# EAGLE board csa_vdc_v1 (EAGLE 6.4), part 1 of 2
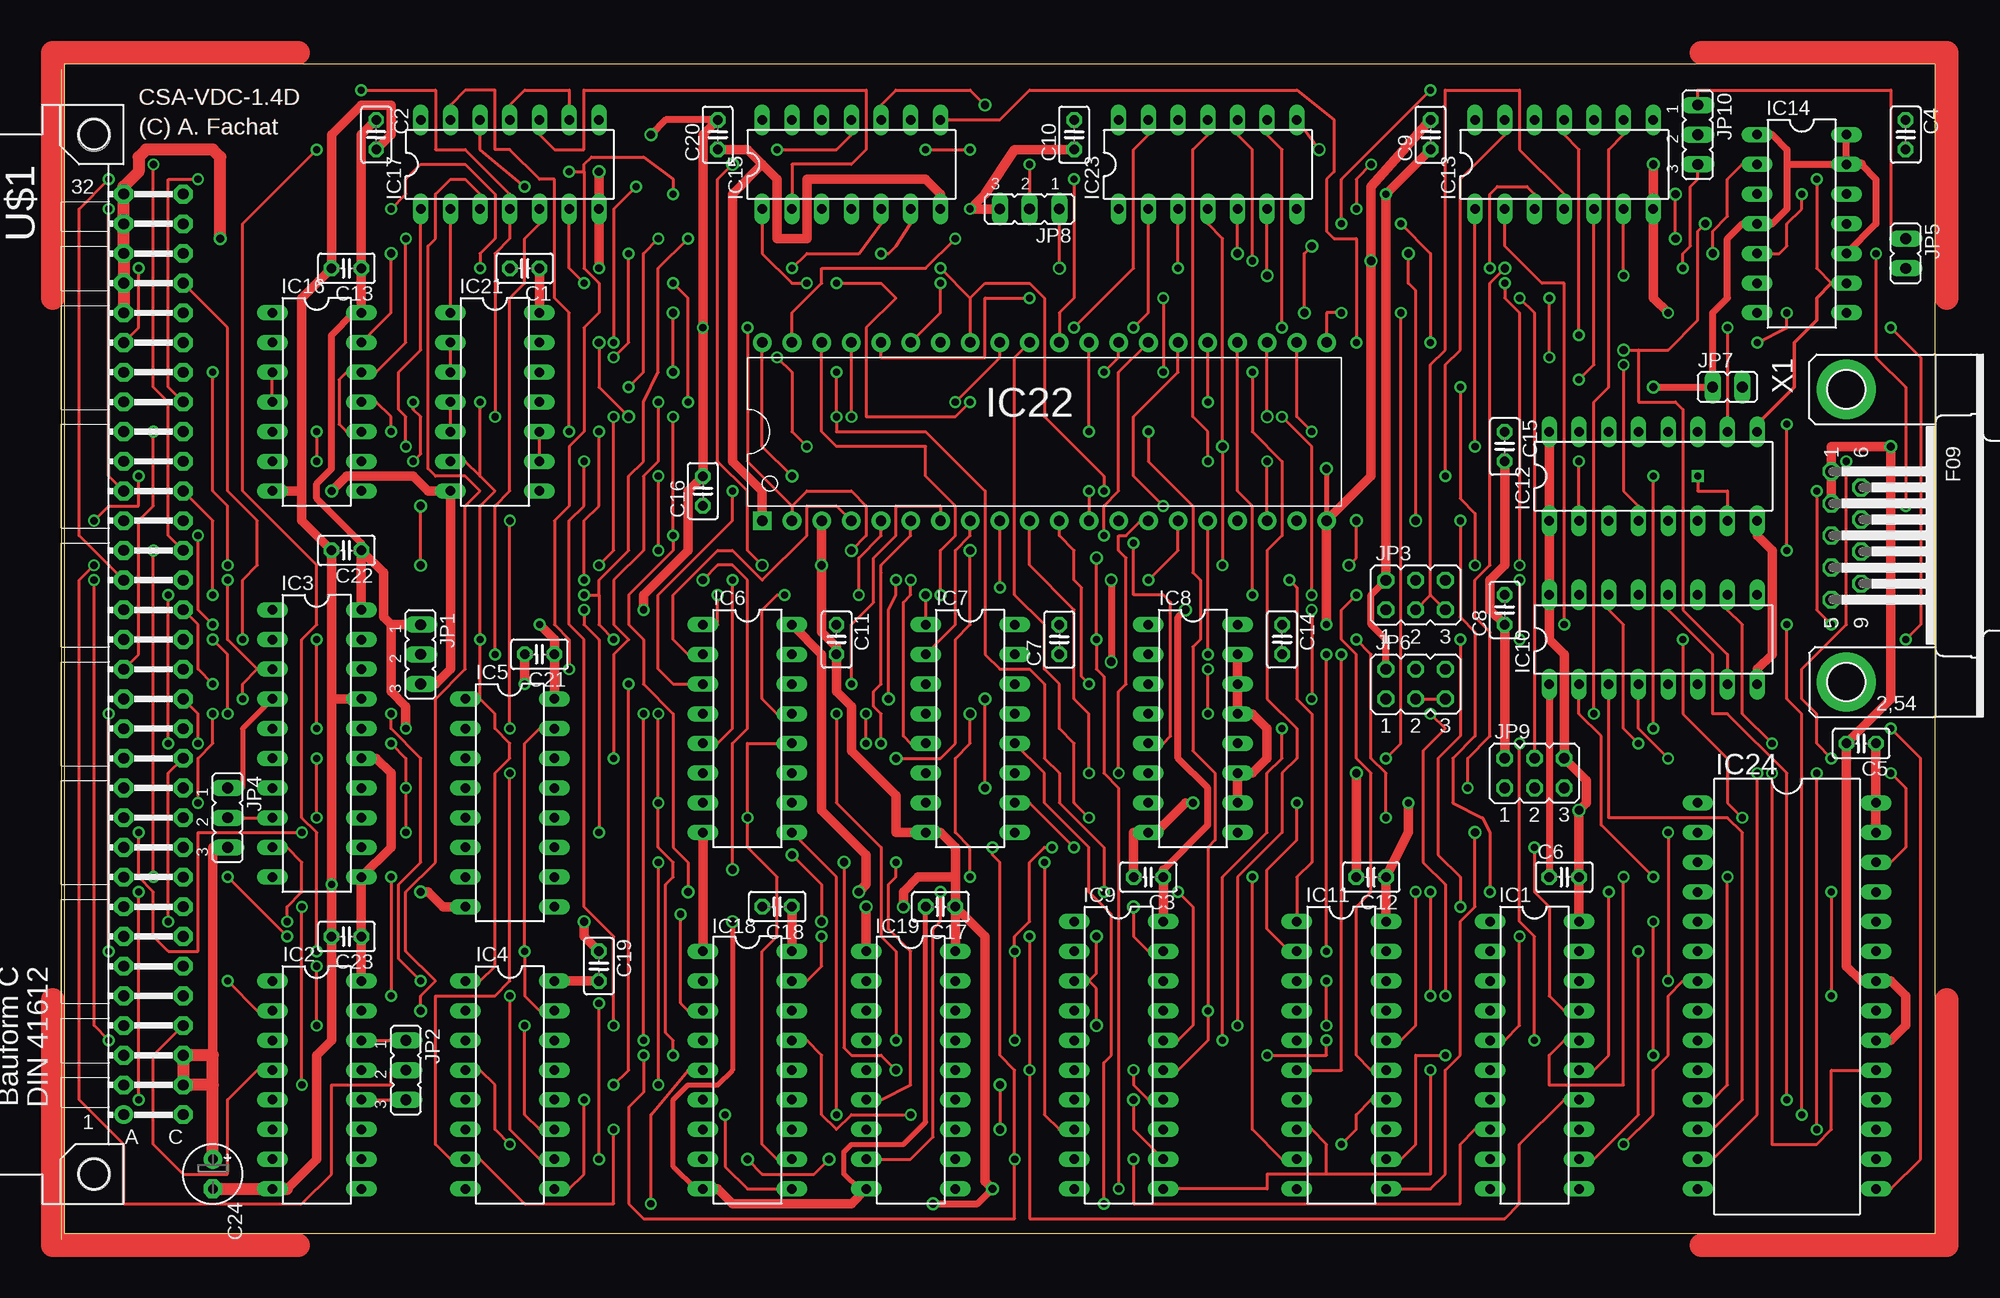
[diagram p0: board, top side]
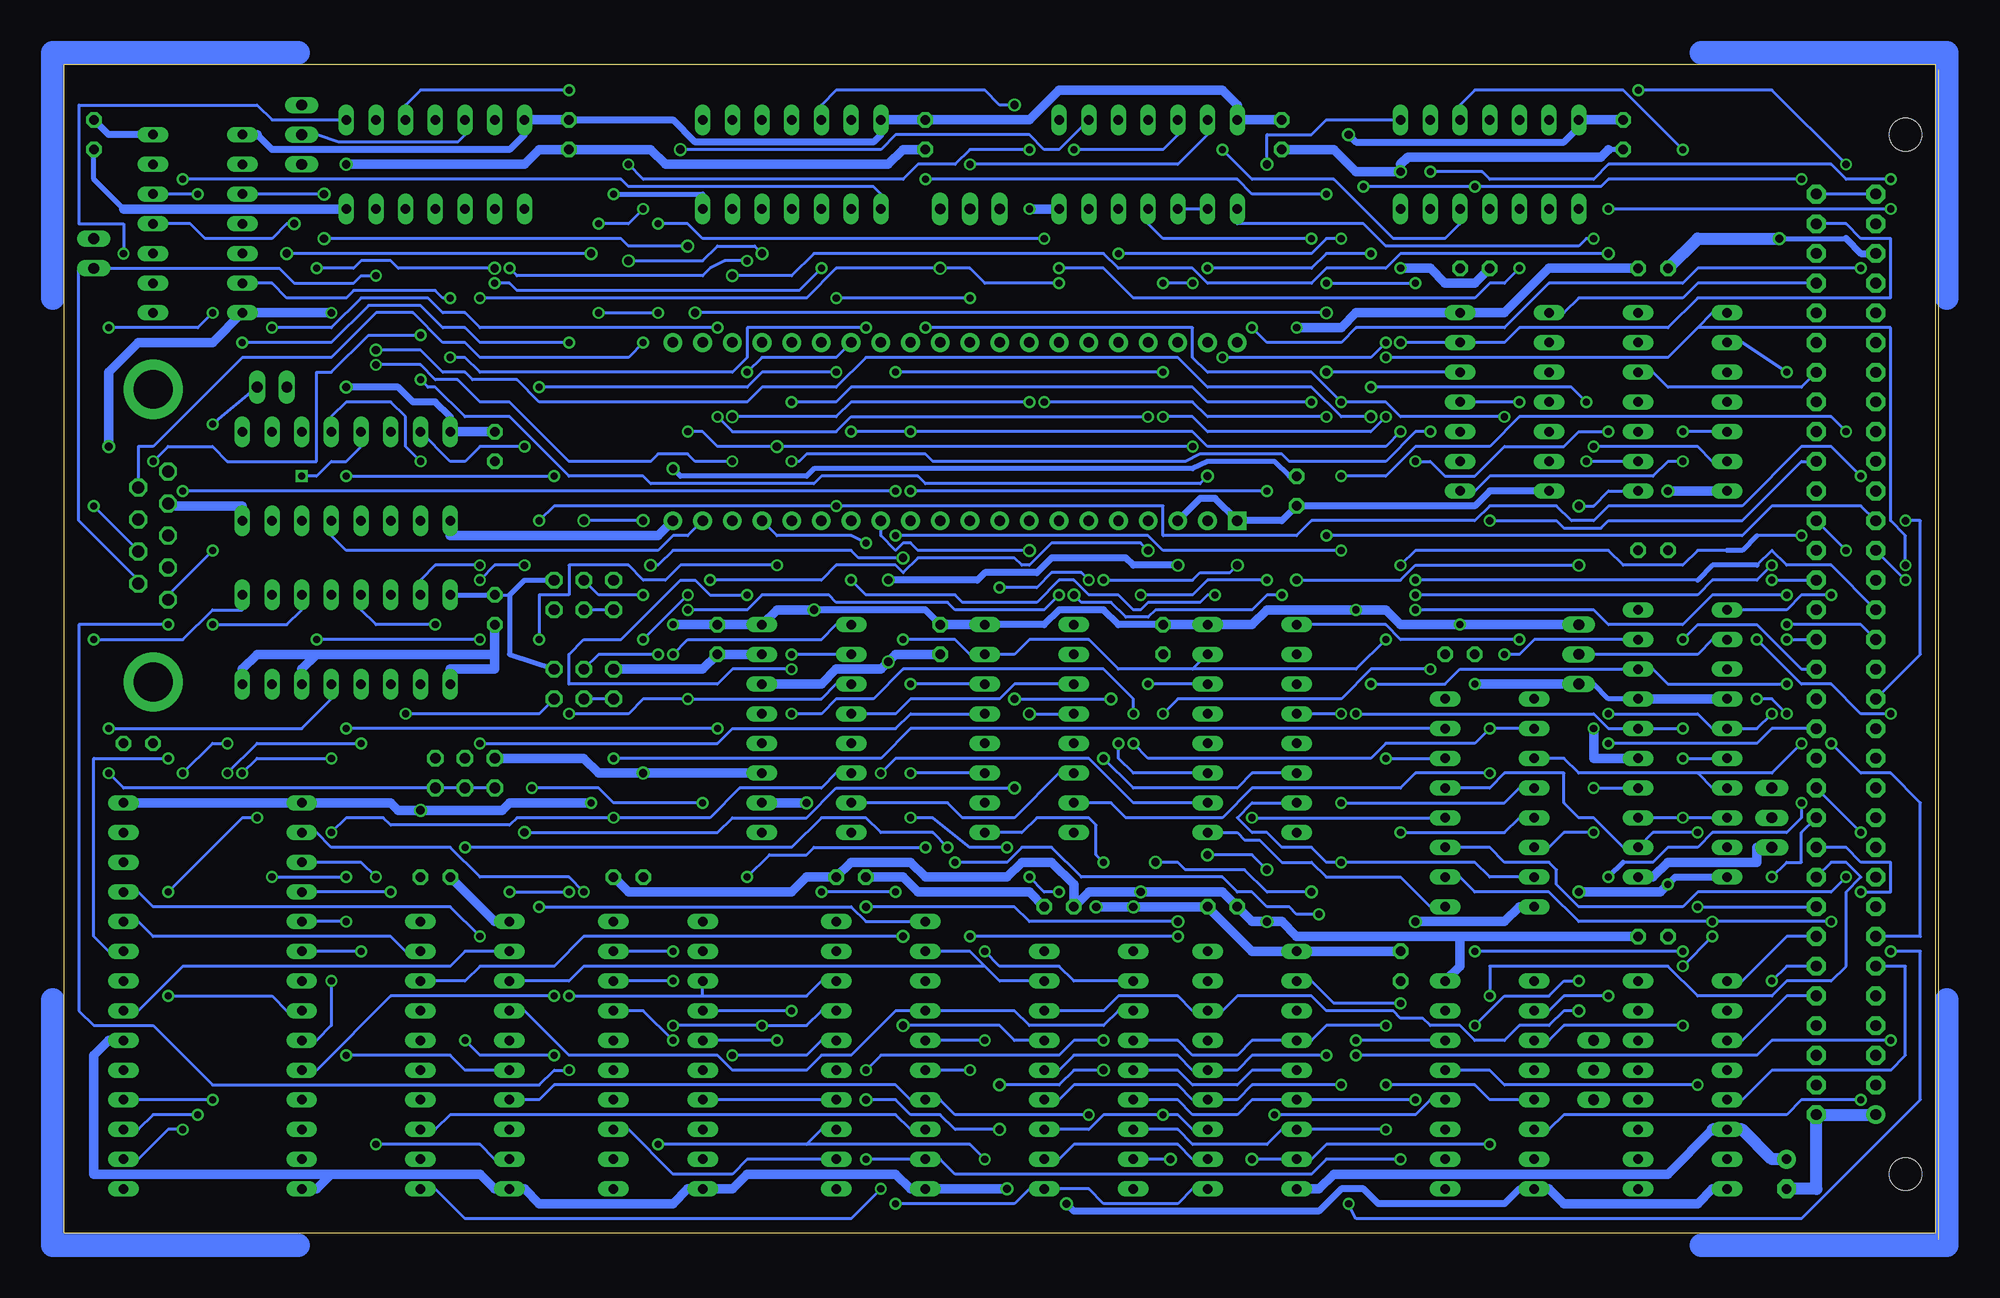
[diagram p1: board, bottom side, seen from below]

Size 160 x 100 mm. Coordinates in mm from the lower left corner, seen from the top.
Outline: 0,0 160,0 160,100 0,100 0,0
Copper layers (1*16): Top 0.035mm / dielectric 1.5mm / Bottom 0.035mm
Design rules "default": minimum track width 10mil, minimum drill 24mil, track to track 8mil, track to pad 8mil, pad to pad 8mil, via to via 8mil, smd to smd 8mil, copper to edge 40mil, drill to drill 8mil, minimum pad ring 10mil, minimum via ring 8mil, stop-mask expansion 4mil, vias tented up to drill 0mil, thermal gap 10mil

## Footprints (pad centres in the part's own frame; a part is rotated, then mirrored left to right if it is on the bottom)
C025-025X050 = drill 0.813 octagon: 1 -1.27,0; 2 1.27,0
E2,5-5 = drill 0.813 pad 1.6: + -1.27,0 | drill 0.813 pad 1.6 octagon: - 1.27,0
DIL20 = drill 0.813 long: 1 -11.43,-3.81; 2 -8.89,-3.81; 3 -6.35,-3.81; 4 -3.81,-3.81; 5 -1.27,-3.81; 6 1.27,-3.81; 7 3.81,-3.81; 8 6.35,-3.81; 9 8.89,-3.81; 10 11.43,-3.81; 11 11.43,3.81; 12 8.89,3.81; 13 6.35,3.81; 14 3.81,3.81; 15 1.27,3.81; 16 -1.27,3.81; 17 -3.81,3.81; 18 -6.35,3.81; 19 -8.89,3.81; 20 -11.43,3.81
DIL16 = drill 0.813 long: 1 -8.89,-3.81; 2 -6.35,-3.81; 3 -3.81,-3.81; 4 -1.27,-3.81; 5 1.27,-3.81; 6 3.81,-3.81; 7 6.35,-3.81; 8 8.89,-3.81; 9 8.89,3.81; 10 6.35,3.81; 11 3.81,3.81; 12 1.27,3.81; 13 -1.27,3.81; 14 -3.81,3.81; 15 -6.35,3.81; 16 -8.89,3.81
DIL20' = drill 0.813 long: 1 -10.16,-3.81; 2 -7.62,-3.81; 3 -5.08,-3.81; 4 -2.54,-3.81; 5 0,-3.81; 6 2.54,-3.81; 7 5.08,-3.81; 8 7.62,-3.81; 9 10.16,-3.81; 10 12.7,-3.81; 11 12.7,3.81; 12 10.16,3.81; 13 7.62,3.81; 14 5.08,3.81; 15 2.54,3.81; 16 0,3.81; 17 -2.54,3.81; 18 -5.08,3.81; 19 -7.62,3.81; 20 -10.16,3.81
DIL14 = drill 0.813 long: 1 -7.62,-3.81; 2 -5.08,-3.81; 3 -2.54,-3.81; 4 0,-3.81; 5 2.54,-3.81; 6 5.08,-3.81; 7 7.62,-3.81; 8 7.62,3.81; 9 5.08,3.81; 10 2.54,3.81; 11 0,3.81; 12 -2.54,3.81; 13 -5.08,3.81; 14 -7.62,3.81
DIL18 = drill 0.813 long: 1 -10.16,-3.81; 2 -7.62,-3.81; 3 -5.08,-3.81; 4 -2.54,-3.81; 5 0,-3.81; 6 2.54,-3.81; 7 5.08,-3.81; 8 7.62,-3.81; 9 10.16,-3.81; 10 10.16,3.81; 11 7.62,3.81; 12 5.08,3.81; 13 2.54,3.81; 14 0,3.81; 15 -2.54,3.81; 16 -5.08,3.81; 17 -7.62,3.81; 18 -10.16,3.81
DIP40 = drill 0.889 pad 1.6 square: 1 -24.13,-7.62 | drill 0.889 pad 1.6: 2 -21.59,-7.62; 3 -19.05,-7.62; 4 -16.51,-7.62; 5 -13.97,-7.62; 6 -11.43,-7.62; 7 -8.89,-7.62; 8 -6.35,-7.62; 9 -3.81,-7.62; 10 -1.27,-7.62; 11 1.27,-7.62; 12 3.81,-7.62; 13 6.35,-7.62; 14 8.89,-7.62; 15 11.43,-7.62; 16 13.97,-7.62; 17 16.51,-7.62; 18 19.05,-7.62; 19 21.59,-7.62; 20 24.13,-7.62; 21 24.13,7.62; 22 21.59,7.62; 23 19.05,7.62; 24 16.51,7.62; 25 13.97,7.62; 26 11.43,7.62; 27 8.89,7.62; 28 6.35,7.62; 29 3.81,7.62; 30 1.27,7.62; 31 -1.27,7.62; 32 -3.81,7.62; 33 -6.35,7.62; 34 -8.89,7.62; 35 -11.43,7.62; 36 -13.97,7.62; 37 -16.51,7.62; 38 -19.05,7.62; 39 -21.59,7.62; 40 -24.13,7.62
DIL28-6 = drill 0.813 long: 1 -16.51,-7.62; 2 -13.97,-7.62; 3 -11.43,-7.62; 4 -8.89,-7.62; 5 -6.35,-7.62; 6 -3.81,-7.62; 7 -1.27,-7.62; 8 1.27,-7.62; 9 3.81,-7.62; 10 6.35,-7.62; 11 8.89,-7.62; 12 11.43,-7.62; 13 13.97,-7.62; 14 16.51,-7.62; 15 16.51,7.62; 16 13.97,7.62; 17 11.43,7.62; 18 8.89,7.62; 19 6.35,7.62; 20 3.81,7.62; 21 1.27,7.62; 22 -1.27,7.62; 23 -3.81,7.62; 24 -6.35,7.62; 25 -8.89,7.62; 26 -11.43,7.62; 27 -13.97,7.62; 28 -16.51,7.62
JP2 = drill 0.914 long: 1 -2.54,0; 2 0,0; 3 2.54,0
JP3Q = drill 0.914 octagon: 1 -2.54,-1.27; 2 -2.54,1.27; 3 0,-1.27; 4 0,1.27; 5 2.54,-1.27; 6 2.54,1.27
JP1 = drill 0.914 long: 1 0,-1.27; 2 0,1.27
CSABUS = drill 0.914 pad 1.6: A1 7.62,36.83 | drill 0.914 pad 1.6 octagon: A2 7.62,34.29; A3 7.62,31.75; A4 7.62,29.21; A5 7.62,26.67; A6 7.62,24.13; A7 7.62,21.59; A8 7.62,19.05; A9 7.62,16.51; A10 7.62,13.97; A11 7.62,11.43; A12 7.62,8.89; A13 7.62,6.35; A14 7.62,3.81; A15 7.62,1.27; A16 7.62,-1.27; A17 7.62,-3.81; A18 7.62,-6.35; A19 7.62,-8.89; A20 7.62,-11.43; A21 7.62,-13.97; A22 7.62,-16.51; A23 7.62,-19.05; A24 7.62,-21.59; A25 7.62,-24.13; A26 7.62,-26.67; A27 7.62,-29.21; A28 7.62,-31.75; A29 7.62,-34.29; A30 7.62,-36.83; A31 7.62,-39.37; A32 7.62,-41.91; C1 2.54,36.83; C2 2.54,34.29; C3 2.54,31.75; C4 2.54,29.21; C5 2.54,26.67; C6 2.54,24.13; C7 2.54,21.59; C8 2.54,19.05; C9 2.54,16.51; C10 2.54,13.97; C11 2.54,11.43; C12 2.54,8.89; C13 2.54,6.35; C14 2.54,3.81; C15 2.54,1.27; C16 2.54,-1.27; C17 2.54,-3.81; C18 2.54,-6.35; C19 2.54,-8.89; C20 2.54,-11.43; C21 2.54,-13.97; C22 2.54,-16.51; C23 2.54,-19.05; C24 2.54,-21.59; C25 2.54,-24.13; C26 2.54,-26.67; C27 2.54,-29.21; C28 2.54,-31.75; C29 2.54,-34.29; C30 2.54,-36.83; C31 2.54,-39.37; C32 2.54,-41.91 | hole 2.794: 10.16,41.91; 10.16,-46.99
F09HP = drill 1.016 octagon: 1 -5.486,-1.27; 2 -2.743,-1.27; 3 0,-1.27; 4 2.743,-1.27; 5 5.486,-1.27; 6 -4.115,1.27; 7 -1.372,1.27; 8 1.372,1.27; 9 4.115,1.27 | drill 3.302 pad 5.08: G1 -12.522,0; G2 12.522,0

## Placement (x,y rotation side)
C1  100n  [C025-025X050]  39.37,82.55 180 top
C2  100n  [C025-025X050]  26.67,93.98 270 top
C3  100n  [C025-025X050]  92.71,30.48 180 top
C4  100n  [C025-025X050]  157.48,93.98 270 top
C5  100n  [C025-025X050]  153.67,41.91 180 top
C6  100n  [C025-025X050]  128.27,30.48 0 top
C7  100n  [C025-025X050]  85.09,50.8 90 top
C8  100n  [C025-025X050]  123.19,53.34 90 top
C9  100n  [C025-025X050]  116.84,93.98 90 top
C10  100n  [C025-025X050]  86.36,93.98 90 top
C11  100n  [C025-025X050]  66.04,50.8 270 top
C12  100n  [C025-025X050]  111.76,30.48 180 top
C13  100n  [C025-025X050]  24.13,82.55 180 top
C14  100n  [C025-025X050]  104.14,50.8 270 top
C15  100n  [C025-025X050]  123.19,67.31 270 top
C16  100n  [C025-025X050]  54.61,63.5 90 top
C17  100n  [C025-025X050]  74.93,27.94 180 top
C18  100n  [C025-025X050]  60.96,27.94 180 top
C19  100n  [C025-025X050]  45.72,22.86 270 top
C20  100n  [C025-025X050]  55.88,93.98 90 top
C21  100n  [C025-025X050]  40.64,49.53 180 top
C22  100n  [C025-025X050]  24.13,58.42 180 top
C23  100n  [C025-025X050]  24.13,25.4 180 top
C24  47u  [E2,5-5]  12.7,5.08 270 top
IC1  74HC374N  [DIL20]  125.73,15.24 270 top
IC2  74HCT138N  [DIL16]  21.59,12.7 270 top
IC3  74LS688BUSOPT  [DIL20']  21.59,43.18 270 top
IC4  74HCT257N  [DIL16]  38.1,12.7 270 top
IC5  74HCT257N  [DIL16]  38.1,36.83 270 top
IC6  74HCT257N  [DIL16]  58.42,43.18 270 top
IC7  74HCT257N  [DIL16]  77.47,43.18 270 top
IC8  74HCT257N  [DIL16]  96.52,43.18 270 top
IC9  74HCT245N  [DIL20]  90.17,15.24 270 top
IC10  74HCT166N  [DIL16]  135.89,50.8 0 top
IC11  74LS273BUSOPT  [DIL20']  109.22,16.51 270 top
IC12  74HCT175N  [DIL16]  135.89,64.77 0 top
IC13  74LS86N  [DIL14]  128.27,91.44 0 top
IC14  74HCT74N  [DIL14]  148.59,86.36 270 top
IC15  74HCT04N  [DIL14]  67.31,91.44 0 top
IC16  74HCT00N  [DIL14]  21.59,71.12 270 top
IC17  74LS32N  [DIL14]  38.1,91.44 0 top
IC18  [DIL18]  58.42,13.97 270 top
IC19  [DIL18]  72.39,13.97 270 top
IC21  74HCT04N  [DIL14]  36.83,71.12 270 top
IC22  CRTC6545SMALLPADS  [DIP40]  83.82,68.58 0 top
IC23  74HCT00N  [DIL14]  97.79,91.44 0 top
IC24  27C128P  [DIL28-6]  147.32,20.32 270 top
JP1  [JP2]  30.48,49.53 270 top
JP2  [JP2]  29.21,13.97 270 top
JP3  [JP3Q]  115.57,54.61 0 top
JP4  [JP2]  13.97,35.56 270 top
JP5  [JP1]  157.48,83.82 180 top
JP6  [JP3Q]  115.57,46.99 0 top
JP7  [JP1]  142.24,72.39 270 top
JP8  [JP2]  82.55,87.63 180 top
JP9  [JP3Q]  125.73,39.37 0 top
JP10  [JP2]  139.7,93.98 270 top
U$1  CSABUS  [CSABUS]  12.7,46.99 180 top
X1  [F09HP]  152.4,59.69 270 top

## Library data of the parts
C1-C24 = rcl
IC1 IC2 IC4-IC10 IC12 IC14-IC16 IC21 IC23 = 74xx-eu
IC3 IC11 IC22 U$1 = csa
IC13 IC17 = 74xx-us
IC18 IC19 = memory-nec
IC24 = microchip
JP1-JP10 = jumper
X1 = con-subd

## Nets
2PHI2: IC17.2 IC18.5 IC19.5 IC21.1 U$1.C29
8PHI2: IC10.7 IC14.11 IC21.13 U$1.C31
/8PHI2: IC14.3 IC21.12
//PHI2: IC1.11 IC6.15 IC7.15 IC14.2 IC15.4 IC16.2
/CAS: IC17.3 IC18.16 IC19.16
/CPURAM: IC9.19 IC16.8
/IOSEL: IC3.1 U$1.A7
/MEMSEL: IC2.5 U$1.A6
/NOCPUACCESS: IC16.3 IC16.4
/PHI2: IC4.15 IC5.15 IC15.2 IC15.3 IC17.10 IC22.21
/RAMWE: IC16.11 IC18.4 IC19.4
/RES: IC11.1 IC22.2 U$1.A27
/SRLOAD: IC10.15 IC23.3
/VDCIOSEL: IC3.19 IC15.11 IC17.5
/VDCMEMSEL: IC15.5 IC16.1 JP2.2
ADRSEL: IC4.1 IC5.1 IC6.1 IC7.1 IC21.6 IC21.11
BA0: IC5.2 IC22.24 U$1.C23
BA1: IC5.5 U$1.C22
BA2: IC5.11 U$1.C21
BA3: IC5.14 IC17.4 IC23.13 U$1.C20
BA4: IC3.3 IC4.2 U$1.C19
BA5: IC3.18 IC4.5 U$1.C18
BA6: IC3.5 IC4.11 U$1.C17
BA7: IC3.16 IC4.14 U$1.C16
BA8: IC3.7 IC5.3 U$1.C15
BA9: IC3.14 IC5.6 U$1.C14
BA10: IC3.9 IC5.10 U$1.C13
BA11: IC3.12 IC5.13 U$1.C12
BA12: IC4.3 U$1.C11
BA13: IC4.6 U$1.C10
BA14: IC4.10 U$1.C9
BA15: IC4.13 U$1.C8
BA16: IC2.1 U$1.C7
BA17: IC2.2 U$1.C6
BA18: IC2.3 U$1.C5
BA19: IC2.4 U$1.C4
BD0: IC9.11 IC11.8 IC22.33 U$1.A22
BD1: IC9.12 IC11.13 IC22.32 U$1.A21
BD2: IC9.13 IC11.14 IC22.31 U$1.A20
BD3: IC9.14 IC11.7 IC22.30 U$1.A19
BD4: IC9.15 IC11.4 IC22.29 U$1.A18
BD5: IC9.16 IC11.17 IC22.28 U$1.A17
BD6: IC9.17 IC11.18 IC22.27 U$1.A16
BD7: IC9.18 IC11.3 IC22.26 U$1.A15
CA3: IC1.9 IC24.7
CA4: IC1.12 IC24.6
CA5: IC1.6 IC24.5
CA6: IC1.15 IC24.4
CA7: IC1.16 IC24.3
CA8: IC1.5 IC24.25
CA9: IC1.19 IC24.24
CA10: IC1.2 IC24.21
CA11: IC13.11 IC24.23
CA12: IC11.16 IC24.2
CURSOR_DELAYED: IC12.15 IC13.1
DISPEN_DELAYED: IC12.10 IC23.9
GND: C1.2 C2.2 C3.2 C4.2 C5.2 C6.1 C7.1 C8.1 C9.1 C10.1 C11.2 C12.2 C13.2 C14.2 C15.2 C16.1 C17.1 C18.1 C19.1 C20.1 C21.2 C22.2 C23.2 C24.- IC1.1 IC1.10 IC2.8 IC3.4 IC3.10 IC3.17 IC4.8 IC5.8 IC6.8 IC7.8 IC8.8 IC8.10 IC8.11 IC8.13 IC8.14 IC8.15 IC9.10 IC10.1 IC10.6 IC10.8 IC11.10 IC12.8 IC13.7 IC14.7 IC15.7 IC16.7 IC17.7 IC18.1 IC18.18 IC19.1 IC19.18 IC21.7 IC22.1 IC22.3 IC23.7 IC24.14 IC24.20 IC24.22 JP1.3 JP3.2 JP4.1 JP6.2 JP8.3 JP9.2 U$1.A1 U$1.A28 U$1.A29 U$1.A30 U$1.A31 U$1.A32 U$1.C1 U$1.C32 X1.1 X1.2
GRAPHIC: JP5.1 JP10.1
GRPH: IC11.5 IC13.13
HIRES: IC8.1 IC11.19
HSINV: IC11.6 JP6.4
HSYNC: IC13.8 X1.8
MA0: IC5.4 IC6.4 IC18.14 IC19.14
MA1: IC5.7 IC6.7 IC18.13 IC19.13
MA2: IC5.9 IC6.9 IC18.12 IC19.12
MA3: IC5.12 IC6.12 IC18.11 IC19.11
MA4: IC4.4 IC7.4 IC18.8 IC19.8
MA5: IC4.7 IC7.7 IC18.7 IC19.7
MA6: IC4.9 IC7.9 IC18.6 IC19.6
MA7: IC4.12 IC7.12 IC18.10 IC19.10
MD0: IC1.8 IC9.9 IC18.2
MD1: IC1.13 IC9.8 IC18.3
MD2: IC1.7 IC9.7 IC18.15
MD3: IC1.14 IC9.6 IC18.17
MD4: IC1.17 IC9.5 IC19.2
MD5: IC1.4 IC9.4 IC19.3
MD6: IC1.18 IC9.3 IC19.15
MD7: IC1.3 IC9.2 IC19.17
N$9: IC7.3 IC8.4
N$10: IC3.2 JP1.2
N$11: IC7.6 IC8.7
N$12: IC10.2 IC24.11
N$13: IC10.3 IC24.12
N$14: IC10.4 IC24.13
N$15: IC10.5 IC24.15
N$16: IC10.10 IC24.16
N$17: IC10.11 IC24.17
N$18: IC10.12 IC24.18
N$19: IC10.14 IC24.19
N$20: IC2.14 JP2.1
N$21: IC2.12 JP2.3
N$22: IC14.6 IC23.2
N$23: IC12.9 IC14.9 IC23.1
N$24: IC11.11 IC17.8
N$25: IC12.4 IC22.18
N$26: IC3.6 IC3.8 IC3.13 JP4.2
N$27: IC21.2 IC21.3
N$28: IC21.4 IC21.5
N$29: IC12.5 IC22.19
N$30: IC21.9 IC21.10
N$31: IC13.9 JP6.1 JP6.3 JP6.5
N$32: IC16.5 IC21.8
N$33: IC16.6 IC17.1
N$34: IC17.13 IC23.11
N$35: IC15.6 IC16.9
N$36: IC12.2 IC12.12
N$37: IC12.7 IC12.13
N$38: IC13.4 JP3.1 JP3.3 JP3.5
N$39: IC10.9 IC15.12
N$40: IC13.3 IC23.10
N$41: JP7.2 X1.5
N$42: IC15.9 IC23.8
N$43: IC14.5 IC14.12
N$44: IC13.5 IC22.40
N$45: IC15.13 JP8.2
N$46: IC24.26 JP9.1 JP9.3 JP9.5
N$48: IC13.10 IC22.39
N$49: IC11.2 JP10.3
N$50: IC13.12 JP10.2
N$52: IC17.6 IC22.25
N$54: IC15.10 IC23.12
N$55: IC17.9 IC17.11
PHI2: IC15.1 IC16.10 IC16.12 IC22.23 U$1.C26
R/W: IC9.1 IC17.12 IC22.22 IC23.4 U$1.C25
RA0: IC8.3 IC22.38 IC24.10
RA1: IC8.6 IC22.37 IC24.9
RA2: IC22.36 IC24.8
RA3: IC22.35 JP8.1 JP9.4
SROUT: IC10.13 IC13.2
VA0: IC6.2 IC22.4
VA1: IC6.5 IC22.5
VA2: IC6.11 IC22.6
VA3: IC6.14 IC22.7
VA4: IC7.2 IC22.8
VA5: IC7.5 IC22.9
VA6: IC7.11 IC22.10
VA7: IC7.14 IC22.11
VA8: IC6.3 IC22.12
VA9: IC6.6 IC22.13
VA10: IC6.10 IC22.14
VA11: IC6.13 IC22.15
VA12: IC8.2 IC22.16
VA13: IC8.5 IC22.17
VA14: IC7.10 IC11.9
VA15: IC7.13 IC11.12
VCC: C1.1 C2.1 C3.1 C4.1 C5.1 C6.2 C7.2 C8.2 C9.2 C10.2 C11.1 C12.1 C13.1 C14.1 C15.1 C16.2 C17.2 C18.2 C19.2 C20.2 C21.1 C22.1 C23.1 C24.+ IC1.20 IC2.6 IC2.16 IC3.11 IC3.15 IC3.20 IC4.16 IC5.16 IC6.16 IC7.16 IC8.16 IC9.20 IC10.16 IC11.20 IC12.1 IC12.16 IC13.14 IC14.1 IC14.4 IC14.10 IC14.13 IC14.14 IC15.14 IC16.14 IC17.14 IC18.9 IC19.9 IC21.14 IC22.20 IC23.5 IC23.14 IC24.1 IC24.27 IC24.28 JP1.1 JP3.6 JP4.3 JP6.6 JP7.1 JP9.6 U$1.C2 U$1.C3
VIDEO: IC15.8 X1.6
VSINV: IC11.15 JP3.4
VSYNC: IC13.6 JP5.2 X1.9
W/-R: IC16.13 IC23.6